# Altium PCB PCB1.pcbdoc
Units mm, origin at the board's own origin, x right, y up, seen from the top; angles counter-clockwise.
Board outline 18 x 22 mm, 2 copper layers (Top Layer, Bottom Layer); 3 components, 14 nets, 28 pads, 0 vias.
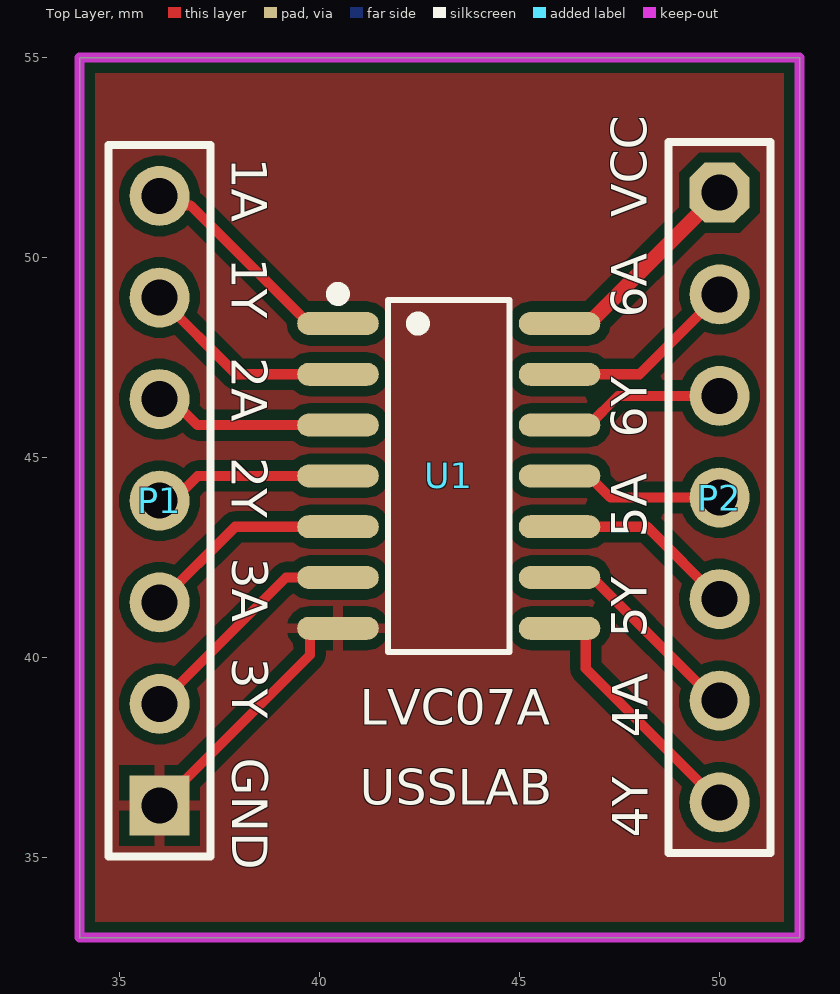
[diagram p0: Top Layer view]
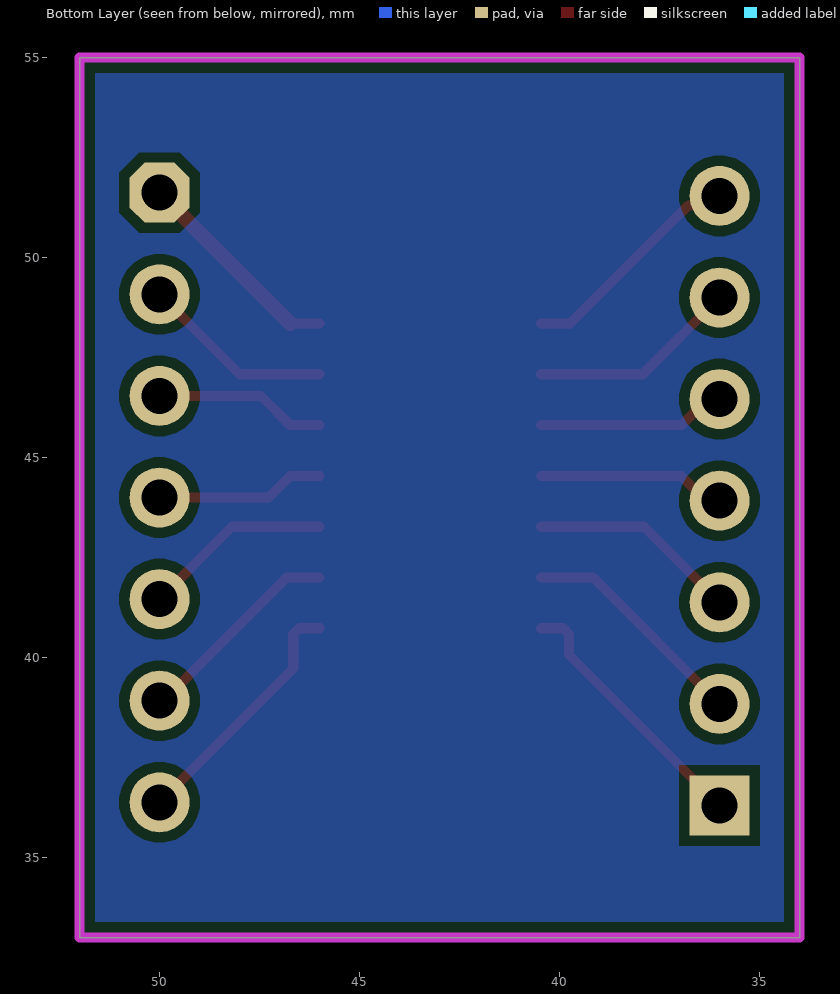
[diagram p1: Bottom Layer view, seen from below]

## Layer stack, top to bottom
Top Solder: solder mask 0.0102, Solder Resist, Dk 3.5
Top Layer: signal copper 0.0356
Dielectric1: dielectric 0.32, FR-4, Dk 4.8
Bottom Layer: signal copper 0.0356
Bottom Solder: solder mask 0.0102, Solder Resist, Dk 3.5

## Board outline
34,33 34,55 52,55 52,33

## Design rules (kind name [scope] priority, off if disabled: settings)
Clearance [All] p1: gap=0.254 ignorepadtopadclearanceinfootprint=FALSE except(0: Arc-Hole Track-Hole SMDPad-Hole THPad-Hole Via-Hole Fill-Hole Poly-Hole Region-Hole Text-Hole)
PolygonConnect [All] p1: connectstyle=Relief reliefconductorwidth=0.254 reliefentries=4 polygonreliefangle="90 Angle" airgapwidth=0.254
RoutingVias [All] p1: holewidth=0.711 width=1.27 viastyle="Through Hole" minholewidth=0.711 minwidth=1.27 maxholewidth=0.711 maxwidth=1.27
SolderMaskExpansion [All] p1: expansion=0.102 istentingtop=FALSE
Width [All] p1: maxlimit=0.254 minlimit=0.254 preferedwidth=0.254
30 further rules are at their usual default settings.

## Components (designator, comment, footprint, x,y, rotation, side; value= is the part's Value field where it differs from the comment)
P1 "Header 7" HDR1X7#1 36,36.3 r90 top
P2 "Header 7" HDR1X7#2 50,51.62 r270 top
U1 "Component_1" PCBComponent_1 43.372,44.889 r0 top

## Footprints (in the part's own frame and the unit in brackets; to place one, negate y for a bottom-side part, rotate by r counter-clockwise, add the part's x,y. Pads: shape width x height; smd on the part's side, far side on the other; paste and mask are expansions set on the pad)
HDR1X7#1 [mm] "Connector; Header; 7 Position"
  rect 1.5x1.5 hole 0.9: 1(0,0)
  round 1.5 hole 0.9: 2(2.54,0) 3(5.08,0) 4(7.62,0) 5(10.16,0) 6(12.7,0) 7(15.24,0)
  silkscreen extent -1.27,-1.27 16.51,1.27
HDR1X7#2 [mm] "Connector; Header; 7 Position"
  oct 1.5x1.5 hole 0.9: 1(0,0)
  round 1.5 hole 0.9: 2(2.54,0) 3(5.08,0) 4(7.62,0) 5(10.16,0) 6(12.7,0) 7(15.24,0)
  silkscreen extent -1.27,-1.27 16.51,1.27
PCBComponent_1 [mm]
  oval 2.038x0.574 smd: 1A(-2.91,3.461) 1Y(-2.91,2.191) 2A(-2.91,0.921) 2Y(-2.91,-0.349) 3A(-2.91,-1.619) 3Y(-2.91,-2.889) 4A(2.628,-2.889) 4Y(2.628,-4.159) 5A(2.628,-0.349) 5Y(2.628,-1.619) 6A(2.628,2.191) 6Y(2.628,0.921) GND(-2.91,-4.159) VCC(2.628,3.461)
  silkscreen extent -3.06,-4.75 1.38,4.35

## Part data
P1 P2: "Header, 7-Pin", LatestRevisionDate=17-Jul-2002, LatestRevisionNote="Re-released for DXP Platform.", Publisher="Altium Limited"

## Nets (pads, with @x,y where several pads share a name; then routed paths per layer and width w, separated by ;. In a path a pad name is that pad's centre, name@x,y a point inside that pad or via, vN(x,y) a via of type N, cw(c..) or ccw(c..) an arc to the next point about the centre after c; other vN are vias at no path point)
NetP1_1: P1.1 U1.GND | length 6.6
  Top Layer w0.254: P1.1 39.762,40.062 39.762,40.582 39.91,40.73 U1.GND
NetP1_2: P1.2 U1.3Y | length 5.8
  Top Layer w0.254: P1.2 39.16,42 U1.3Y
NetP1_3: P1.3 U1.3A | length 5.2
  Top Layer w0.254: P1.3 37.89,43.27 U1.3A
NetP1_4: P1.4 U1.2Y | length 4.7
  Top Layer w0.254: P1.4 36.337,43.92 36.957,44.54 U1.2Y
NetP1_5: P1.5 U1.2A | length 4.7
  Top Layer w0.254: P1.5 36.299,46.46 36.949,45.81 U1.2A
NetP1_6: P1.6 U1.1Y | length 5.3
  Top Layer w0.254: P1.6 37.92,47.08 U1.1Y
NetP1_7: P1.7 U1.1A | length 5.8
  Top Layer w0.254: P1.7 36.238,51.302 36.778,51.302 39.73,48.35 U1.1A
NetP2_1: P2.1 U1.VCC | length 5.4
  Top Layer w0.254: U1.VCC U1.VCC@46.731,48.35
  Top Layer w0.381: U1.VCC@46.731,48.35 P2.1@50,51.619
NetP2_2: P2.2 U1.6A | length 4.8
  Top Layer w0.254: U1.6A 48,47.08 P2.2
NetP2_3: P2.3 U1.6Y | length 4.3
  Top Layer w0.254: U1.6Y 46.732,45.81 47.462,46.54 P2.3
NetP2_4: P2.4 U1.5A | length 4.2
  Top Layer w0.254: U1.5A 46.732,44.54 47.272,44 P2.4
NetP2_5: P2.5 U1.5Y | length 4.7
  Top Layer w0.254: U1.5Y 48.19,43.27 P2.5
NetP2_6: P2.6 U1.4A | length 5.3
  Top Layer w0.254: U1.4A 46.819,42 49.899,38.92 P2.6
NetP2_7: P2.7 U1.4Y | length 6.3
  Top Layer w0.254: U1.4Y 46.507,40.73 46.655,40.582 46.655,39.725 P2.7

## Polygon pours and split planes (outlines as drawn)
NetP1_1 on Top Layer "NETP1_1_L01_P000" (solid, pour order 0): 34,55 52,55 52,33 34,33
no net on Bottom Layer "NONET_L02_P001" (solid, pour order 1): 52,55 52,33 34,33 34,55

## Keep-outs
Keep-Out Layer:
  the board outline again, w0.254

## Silkscreen, mask and mechanical layers (free items; w line width, h text height)
Top Overlay:
  text "1A" at 37.5,52.5 h1.52 r270
  text "VCC" at 48.483,51.001 h1.52 r90
  text "1Y" at 37.5,50 h1.52 r270
  text "6A" at 48.483,48.5 h1.52 r90
  text "2A" at 37.5,47.501 h1.52 r270
  text "6Y" at 48.483,45.5 h1.52 r90
  text "2Y" at 37.5,45.001 h1.52 r270
  text "5A" at 48.483,43 h1.52 r90
  text "3A" at 37.517,42.5 h1.52 r270
  text "5Y" at 48.483,40.5 h1.52 r90
  text "3Y" at 37.517,40 h1.52 r270
  text "LVC07A" at 41,38.017 h1.52
  text "4A" at 48.5,38 h1.52 r90
  text "GND" at 37.517,37.5 h1.52 r270
  text "USSLAB" at 41,36.017 h1.52
  text "4Y" at 48.5,35.5 h1.52 r90

## Dimensions
34,55 to 34,33 on Drill Drawing
34,33 to 52,33 on Drill Drawing